# Altium PCB devrepcb (2).PcbDoc
Units mm, origin at the board's own origin, x right, y up, seen from the top; angles counter-clockwise.
Board outline 100 x 100 mm, 2 copper layers (Top Layer, Bottom Layer); 13 components, 18 nets, 65 pads, 0 vias.
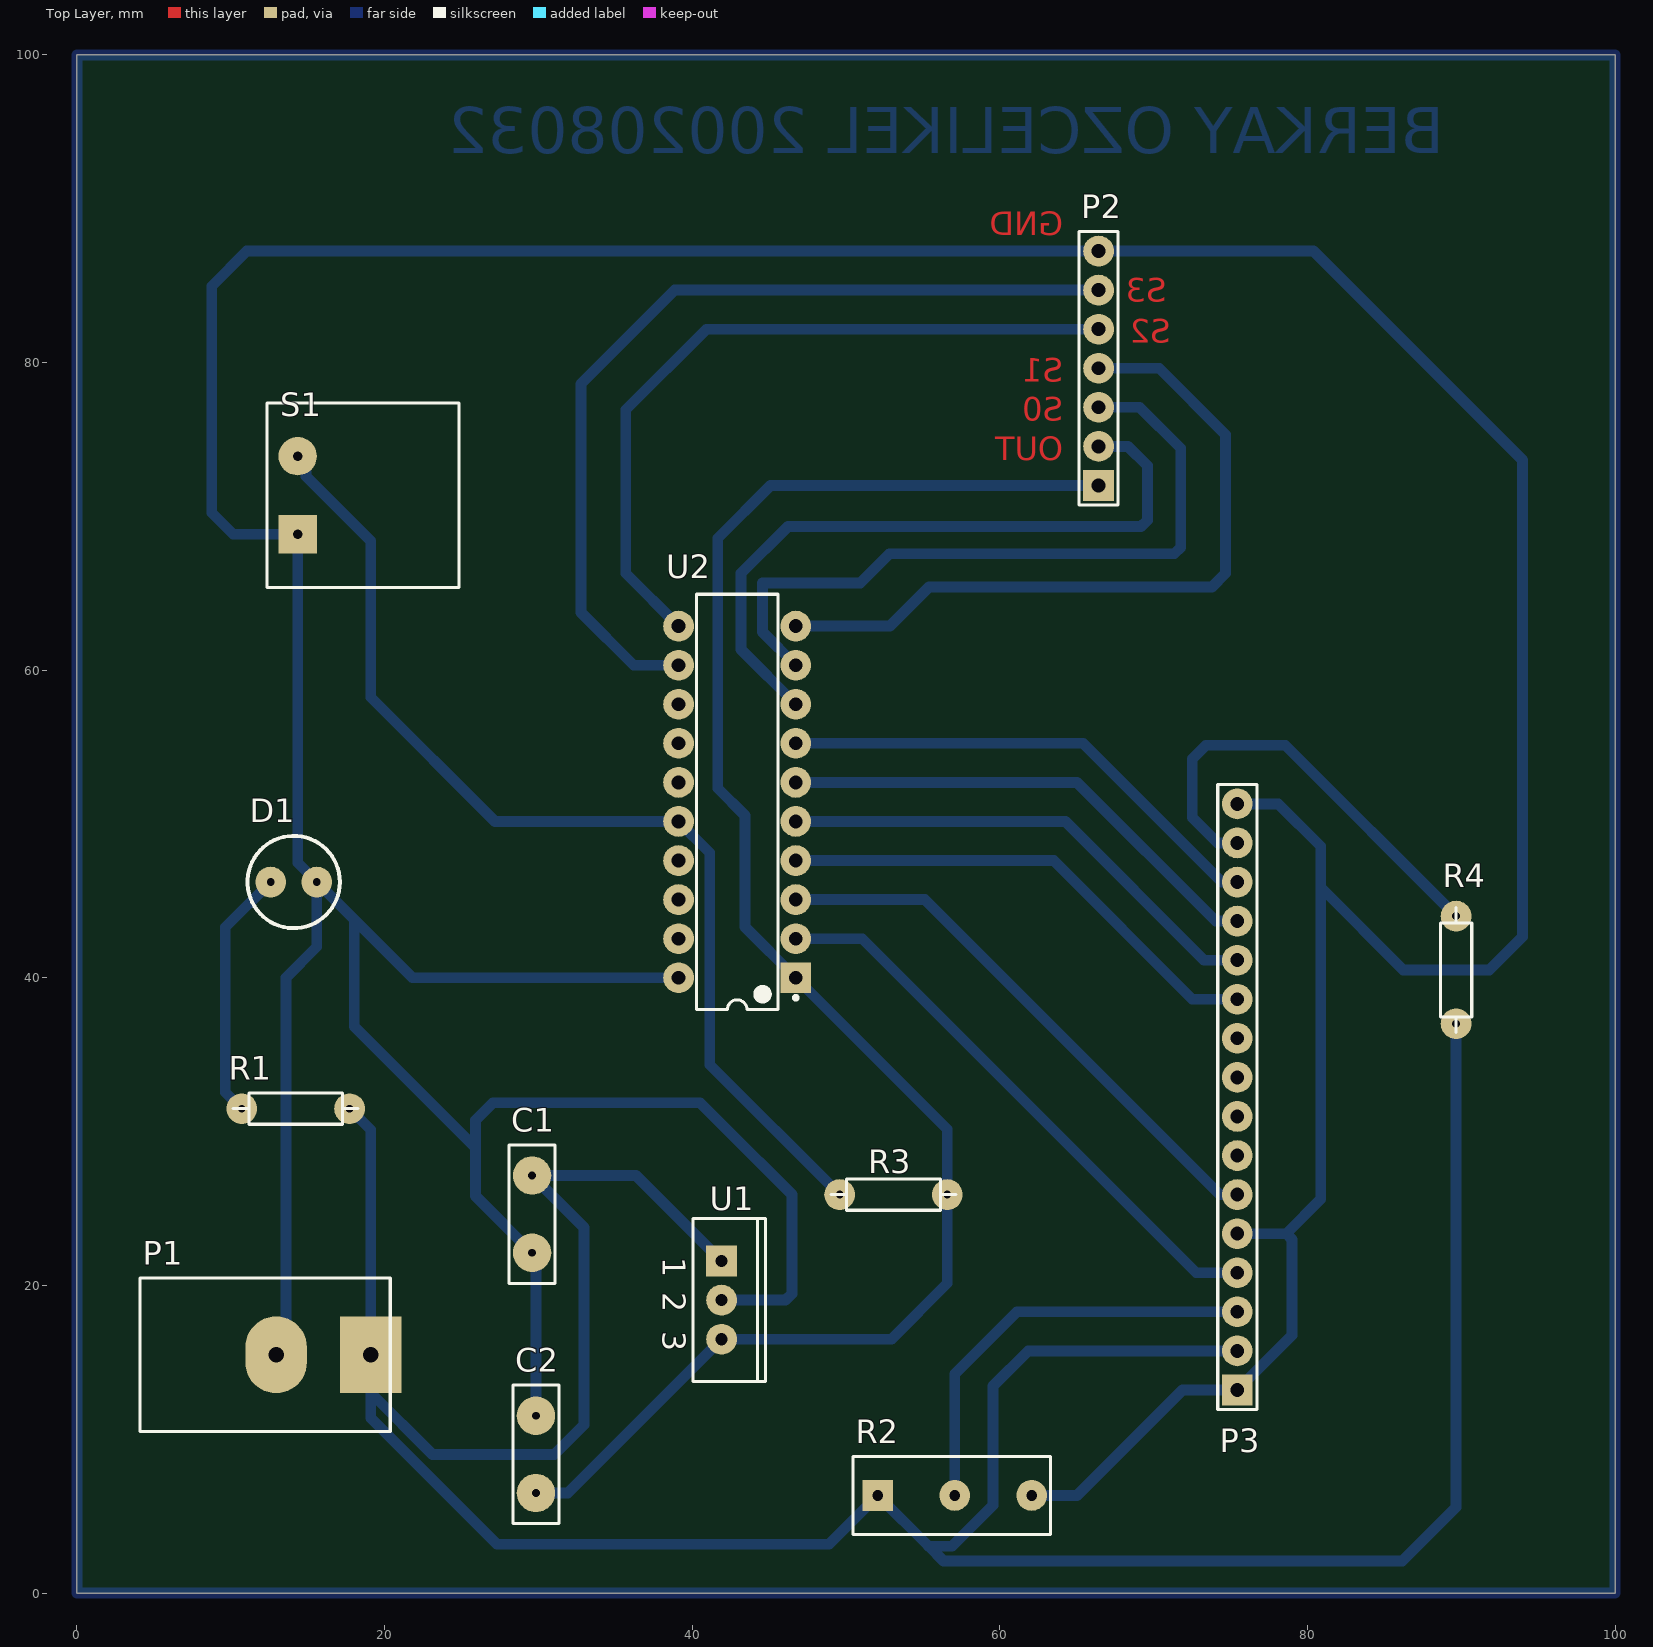
[diagram p0: Top Layer view]
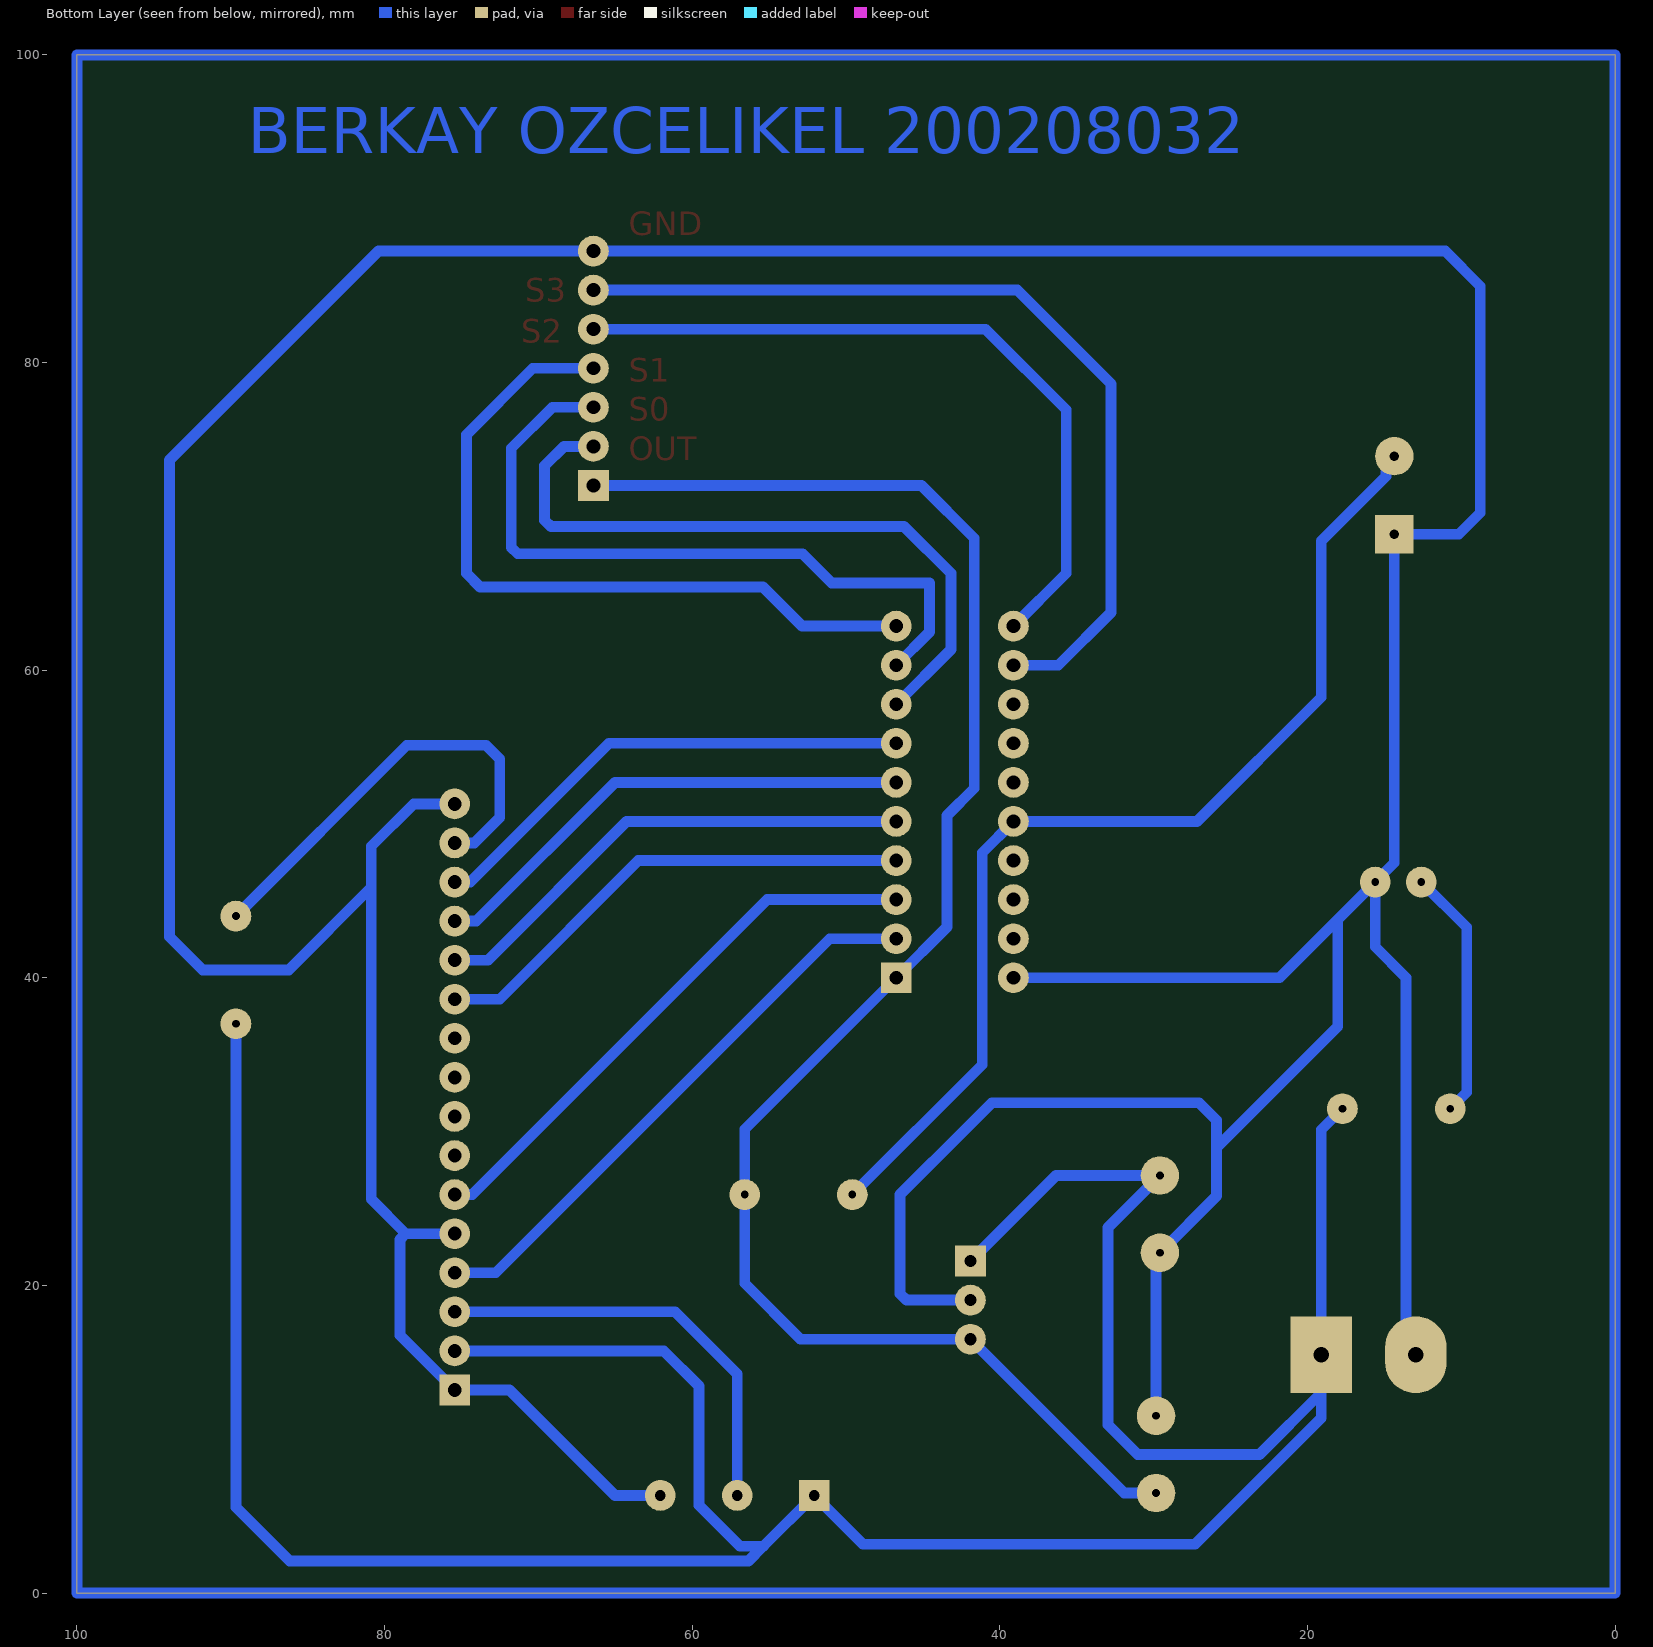
[diagram p1: Bottom Layer view, seen from below]

## Layer stack, top to bottom
Top Solder: solder mask 0.0102, Solder Resist, Dk 3.5
Top Layer: signal copper 0.0356
Dielectric 1: dielectric 0.32, FR-4, Dk 4.8
Bottom Layer: signal copper 0.0356
Bottom Solder: solder mask 0.0102, Solder Resist, Dk 3.5

## Board outline
0,0 0,100 100,100 100,0
cut-out: -25.4,-25.4 -25.146,-25.4 -25.146,-25.146 -25.4,-25.146

## Design rules (kind name [scope] priority, off if disabled: settings)
Clearance [All] p1: gap=0.254 ignorepadtopadclearanceinfootprint=FALSE
FanoutControl Fanout_Small [All] p1 off: bgadir=Out bgaviamode=Centered fanoutstyle=Auto fanoutdirection=Alternating viagrid=0.025 // Protel DXP Scope 1 Expression Was: (CompPinCount < 5)   Fanout_Small (Default Rule)
FanoutControl Fanout_Default [All] p2: bgadir=Out bgaviamode=Centered fanoutstyle=Auto fanoutdirection=Alternating viagrid=0.025 // Fanout_Default (Default Rule)
FanoutControl Fanout_SOIC [All] p3 off: bgadir=Out bgaviamode=Centered fanoutstyle=Auto fanoutdirection=Alternating viagrid=0.025 // Protel DXP Scope 1 Expression Was: IsSOIC   Fanout_SOIC (Default Rule)
FanoutControl Fanout_BGA [All] p4 off: bgadir=Out bgaviamode=Centered fanoutstyle=Auto fanoutdirection=Alternating viagrid=0.025 // Protel DXP Scope 1 Expression Was: IsBGA   Fanout_BGA (Default Rule)
FanoutControl Fanout_LCC [All] p5 off: bgadir=Out bgaviamode=Centered fanoutstyle=Auto fanoutdirection=Alternating viagrid=0.025 // Protel DXP Scope 1 Expression Was: IsLCC   Fanout_LCC (Default Rule)
PolygonConnect [All] p1: connectstyle=Relief reliefconductorwidth=0.254 reliefentries=4 polygonreliefangle="90 Angle" airgapwidth=0.254
RoutingLayers [All] p1: top layer_v5=FALSE bottom layer_v5=TRUE
RoutingVias [All] p1: holewidth=0.711 width=1.27 viastyle="Through Hole" minholewidth=0.711 minwidth=1.27 maxholewidth=0.711 maxwidth=1.27
SilkToSolderMaskClearance [All] p1 off: minsilkscreentomaskgap=0.254 clearancetoexposedcopper=TRUE // Protel DXP Scope 1 Expression Was: IsPad
SolderMaskExpansion [All] p1: expansion=0.102 istentingtop=FALSE
Width [All] p1: maxlimit=1 minlimit=0.5 preferedwidth=0.7
23 further rules are at their usual default settings.

## Classes and differential pairs
component class devresematik: C1 C2 D1 P2 R1 R2 R3 R4 S1 U1 U2

## Components (designator, comment, footprint, x,y, rotation, side; value= is the part's Value field where it differs from the comment)
C1 "Cap" RAD-0.3__ 29.591,24.638 r90 top
C2 "Cap" RAD-0.3__ 29.845,9.017 r270 top
D1 "LED0" LED-0__ 14.097,46.228 r180 top
P1 "Header 2" HDR1X2__ 19.104,15.494 r180 top
P2 "Header 7" HDR1X7 66.421,72.009 r90 top
P3 "Header 16" HDR1X16__ 75.438,13.208 r90 top
R1 "Res2" AXIAL-0.4 14.224,31.496 r0 top
R2 "RPot" VR5 57.07,6.35 r180 top
R3 "Res2" AXIAL-0.4 53.086,25.908 r180 top
R4 "Res2" AXIAL-0.4 89.662,40.513 r270 top
S1 "SW-PB" SPST-2__ 14.351,71.374 r90 top
U1 "LF33CV" TO-220A 41.91,19.05 r270 top
U2 "MSP430G2553IN20" TI-N20 42.926,51.435 r180 top

## Footprints (in the part's own frame and the unit in brackets; to place one, negate y for a bottom-side part, rotate by r counter-clockwise, add the part's x,y. Pads: shape width x height; smd on the part's side, far side on the other; paste and mask are expansions set on the pad)
AXIAL-0.4 [mm] "Axial Device, Thru-Hole; 2 Leads; 0.4 in Pin Spacing"
  round 2 hole 0.5: 1(-3.5,0) 2(3.5,0)
  silkscreen extent -4.06,-1.02 4.06,1.02, body extent -4,-1.11 4,1.11, height 1.11
HDR1X2__ [mm] "Connector; Header; 2 Position"
  rect 4x5 hole 1: 1(0,0)
  oval 4x5 hole 1: 2(6.15,0)
  silkscreen extent -1.27,-5 15,5, body extent -0.7,-4.4 13.5,5.4, height 12
HDR1X7 [mm] "Connector; Header; 7 Position"
  rect 2x2 hole 0.9: 1(0,0)
  round 2 hole 0.9: 2(2.54,0) 3(5.08,0) 4(7.62,0) 5(10.16,0) 6(12.7,0) 7(15.24,0)
  silkscreen extent -1.27,-1.27 16.51,1.27
HDR1X16__ [mm] "Connector; Header; 16 Position"
  rect 2x2 hole 0.9: 1(0,0)
  round 2 hole 0.9: 2(2.54,0) 3(5.08,0) 4(7.62,0) 5(10.16,0) 6(12.7,0) 7(15.24,0) 8(17.78,0) 9(20.32,0) 10(22.86,0) 11(25.4,0) 12(27.94,0) 13(30.48,0) 14(33.02,0) 15(35.56,0) 16(38.1,0)
  silkscreen extent -1.27,-1.27 39.37,1.27, body extent -8,-33.5 72,2.5, height 14
LED-0__ [mm] "LED; 2 Leads"
  round 2 hole 0.5: 1(1.5,0) 2(-1.5,0)
  silkscreen extent -3,-3 3,3, body extent -3,-3 3,3, height 10
RAD-0.3__ [mm] "Radial Cap, Thru-Hole; 2 Leads; 0.3 in Pin Spacing"
  round 2.5 hole 0.5: 1(-2.51,0) 2(2.51,0)
  silkscreen extent -4.5,-1.5 4.5,1.5, body extent -3.55,-1.15 3.55,1.15, height 8.05
SPST-2__ [mm] "Switch; 2 Leads"
  rect 2.5x2.5 hole 0.6: 1(-2.54,0)
  round 2.5 hole 0.6: 2(2.54,0)
  silkscreen extent -6,-10.5 6,2, body extent -6,-11.52 6,2.52, height 9
TI-N20 [mm] "DIP, 20-Leads, Body 25.4x6.35 mm, Pitch 2.54 mm"
  rect 2x2 hole 0.9: 1(-3.81,11.43)
  round 2 hole 0.9: 2(-3.81,8.89) 3(-3.81,6.35) 4(-3.81,3.81) 5(-3.81,1.27) 6(-3.81,-1.27) 7(-3.81,-3.81) 8(-3.81,-6.35) 9(-3.81,-8.89) 10(-3.81,-11.43) 11(3.81,-11.43) 12(3.81,-8.89) 13(3.81,-6.35) 14(3.81,-3.81) 15(3.81,-1.27) 16(3.81,1.27) 17(3.81,3.81) 18(3.81,6.35) 19(3.81,8.89) 20(3.81,11.43)
  silkscreen extent -3.94,-13.5 2.65,13.5, body extent -3.95,-13.45 3.95,13.45, height 5.08
TO-220A [mm] "TO, Thru-Hole, Vertical, Heatsink Mounted; 3 In-Line Leads; Pitch 2.54 mm"
  rect 2x2 hole 0.8: 1(-2.54,0)
  round 2 hole 0.8: 2(0,0) 3(2.54,0)
  silkscreen extent -5.3,-1.85 5.3,2.85, body extent -5,-2.01 5,2, height 21
VR5 [mm] "Thru-Hole; 3 Leads"
  rect 2x2 hole 0.7: 1(5,0)
  round 2 hole 0.7: 2(-5,0) 3(0,0)
  silkscreen extent -6.22,-2.54 6.6,2.54

## Part data
C1 C2: "Capacitor"
D1: "Typical INFRARED GaAs LED"
P1: "Header, 2-Pin"
P2: "Header, 7-Pin"
P3: "Header, 16-Pin"
R1 R3 R4: "Resistor"
R2: "Potentiometer"
S1: "Switch"
U1: "500mA, Very Low Drop (0.45V) Voltage Regulator"
U2: "16 MHz Mixed Signal Microcontroller with 16 KB Flash, 512 B SRAM and 24 GPIOs, -40 to 85 degC, 20-pin DIP (N), Pb-Free (RoHS)"

## Nets (pads, with @x,y where several pads share a name; then routed paths per layer and width w, separated by ;. In a path a pad name is that pad's centre, name@x,y a point inside that pad or via, vN(x,y) a via of type N, cw(c..) or ccw(c..) an arc to the next point about the centre after c; other vN are vias at no path point)
GND: C1.1 C2.1 D1.2 P1.2 P2.7 P3.1 P3.5 P3.16 R2.2 S1.1 U1.2 U2.20 | length 378.5
  Bottom Layer w0.7: P1.2 13.589,16.129 13.589,40.005 15.597,42.013 D1.2 ; C2.1 29.845,21.874 C1.1 25.908,25.811 25.908,28.956 ; U2.20 21.82,40.005 18.034,43.791 ; U1.2 46.072,19.05 46.482,19.46 46.482,25.908 42.1,30.29 40.513,31.877 27.051,31.877 25.908,30.734 25.908,28.956 ; R2.2 65.024,6.35 71.882,13.208 P3.1 78.994,16.764 78.994,22.987 78.613,23.368 ; P3.5 78.613,23.368 ; P3.16 78.105,51.308 80.86,48.553 80.86,45.886 ; D1.2 18.034,43.791 ; D1.2 14.351,47.474 S1.1 10.16,68.834 8.763,70.231 8.763,84.963 11.049,87.249 P2.7 80.391,87.249 93.98,73.66 93.98,42.672 91.821,40.513 86.233,40.513 80.86,45.886 ; 18.034,43.791 18.034,36.83 25.908,28.956 ; 78.613,23.368 80.86,25.615 80.86,45.886
NetC1_2: C1.2 P1.1 P3.2 R1.2 R2.1 R4.2 U1.1 | length 209
  Bottom Layer w0.7: R1.2 19.104,30.116 P1.1 P1.1@19.104,13.027 ; U1.1 36.352,27.148 C1.2 32.969,23.77 32.969,10.947 31.039,9.017 23.114,9.017 P1.1@19.104,13.027 ; P3.2 61.849,15.748 59.563,13.462 59.563,5.715 56.896,3.048 55.372,3.048 ; R4.2 89.662,5.588 86.157,2.083 56.337,2.083 55.372,3.048 ; P1.1@19.104,13.027 19.104,11.379 27.308,3.175 48.895,3.175 R2.1 55.372,3.048
NetC2_2: C2.2 P2.1 R3.1 U1.3 U2.1 | length 113.2
  Bottom Layer w0.7: C2.2 31.907,6.507 U1.3 52.959,16.51 56.586,20.137 R3.1 56.586,30.155 U2.1 43.434,43.307 43.434,50.546 41.656,52.324 41.656,68.58 45.085,72.009 P2.1
NetD1_1: D1.1 R1.1 | length 16.4
  Bottom Layer w0.7: R1.1 9.652,32.568 9.652,43.283 D1.1
NetP2_2: P2.2 U2.8 | length 45.1
  Bottom Layer w0.7: U2.8 43.18,61.341 43.18,66.294 46.228,69.342 69.186,69.342 69.596,69.752 69.596,73.283 68.33,74.549 P2.2
NetP2_3: P2.3 U2.9 | length 47.3
  Bottom Layer w0.7: U2.9 44.577,62.484 44.577,65.659 50.927,65.659 52.832,67.564 71.345,67.564 71.755,67.974 71.755,74.422 69.088,77.089 P2.3
NetP2_4: P2.4 U2.10 | length 48.4
  Bottom Layer w0.7: U2.10 52.864,62.865 55.404,65.405 73.787,65.405 74.676,66.294 74.676,75.311 70.358,79.629 P2.4
NetP2_5: P2.5 U2.11 | length 48.4
  Bottom Layer w0.7: U2.11 35.687,66.294 35.687,76.933 40.923,82.169 P2.5
NetP2_6: P2.6 U2.12 | length 58.8
  Bottom Layer w0.7: U2.12 36.195,60.325 32.766,63.754 32.766,78.613 38.862,84.709 P2.6
NetP3_3: P3.3 R2.3 | length 27.9
  Bottom Layer w0.7: R2.3 57.07,14.247 61.11,18.288 P3.3
NetP3_4: P3.4 U2.2 | length 37.7
  Bottom Layer w0.7: U2.2 51.054,42.545 72.771,20.828 P3.4
NetP3_6: P3.6 U2.3 | length 36.6
  Bottom Layer w0.7: U2.3 55.118,45.085 74.295,25.908 P3.6
NetP3_11: P3.11 U2.4 | length 32.4
  Bottom Layer w0.7: U2.4 63.5,47.625 72.517,38.608 P3.11
NetP3_12: P3.12 U2.5 | length 32.4
  Bottom Layer w0.7: U2.5 64.262,50.165 73.279,41.148 P3.12
NetP3_13: P3.13 U2.6 | length 32.4
  Bottom Layer w0.7: U2.6 65.024,52.705 74.041,43.688 P3.13
NetP3_14: P3.14 U2.7 | length 32.4
  Bottom Layer w0.7: U2.7 65.405,55.245 74.422,46.228 P3.14
NetP3_15: P3.15 R4.1 | length 29.5
  Bottom Layer w0.7: P3.15 74.168,48.768 72.517,50.419 72.517,54.229 73.406,55.118 78.557,55.118 R4.1
NetR3_2: R3.2 S1.2 U2.16 | length 69.6
  Bottom Layer w0.7: S1.2 14.351,73.427 14.896,72.882 14.896,72.607 19.104,68.399 19.104,58.239 27.178,50.165 U2.16 41.148,48.133 41.148,34.346 R3.2
pads on no net: P3.7 P3.8 P3.9 P3.10 U2.13 U2.14 U2.15 U2.17 U2.18 U2.19
copper on no net: | length 400
  Bottom Layer w0.7: 0,0 0,100 100,100 100,0 0,0

## Other copper
Top Layer:
  text "GND" at 64.135,88.265 h1.52
  text "S3" at 70.866,83.947 h1.52
  text "S2" at 71.12,81.28 h1.52
  text "S1" at 64.135,78.74 h1.52
  text "S0" at 64.135,76.2 h1.52
  text "OUT" at 64.135,73.66 h1.52
Bottom Layer:
  text "BERKAY OZCELIKEL 200208032" at 88.9,93.599 h3

## Text inside footprints (layer, text, board x,y; h text height)
U1: Top Overlay "3" at 38.085,17.01 h1.5 r270; Top Overlay "2" at 38.085,19.55 h1.5 r270; Top Overlay "1" at 38.085,21.84 h1.5 r270